# Altium PCB MSampler3.PcbDoc
Units mil, origin at the board's own origin, x right, y up, seen from the top; angles counter-clockwise.
Board outline 2555.12 x 1345 mil, 2 copper layers (Top Layer, Bottom Layer), stack 12.8 mil thick; 56 components, 51 nets, 266 pads, 108 vias.
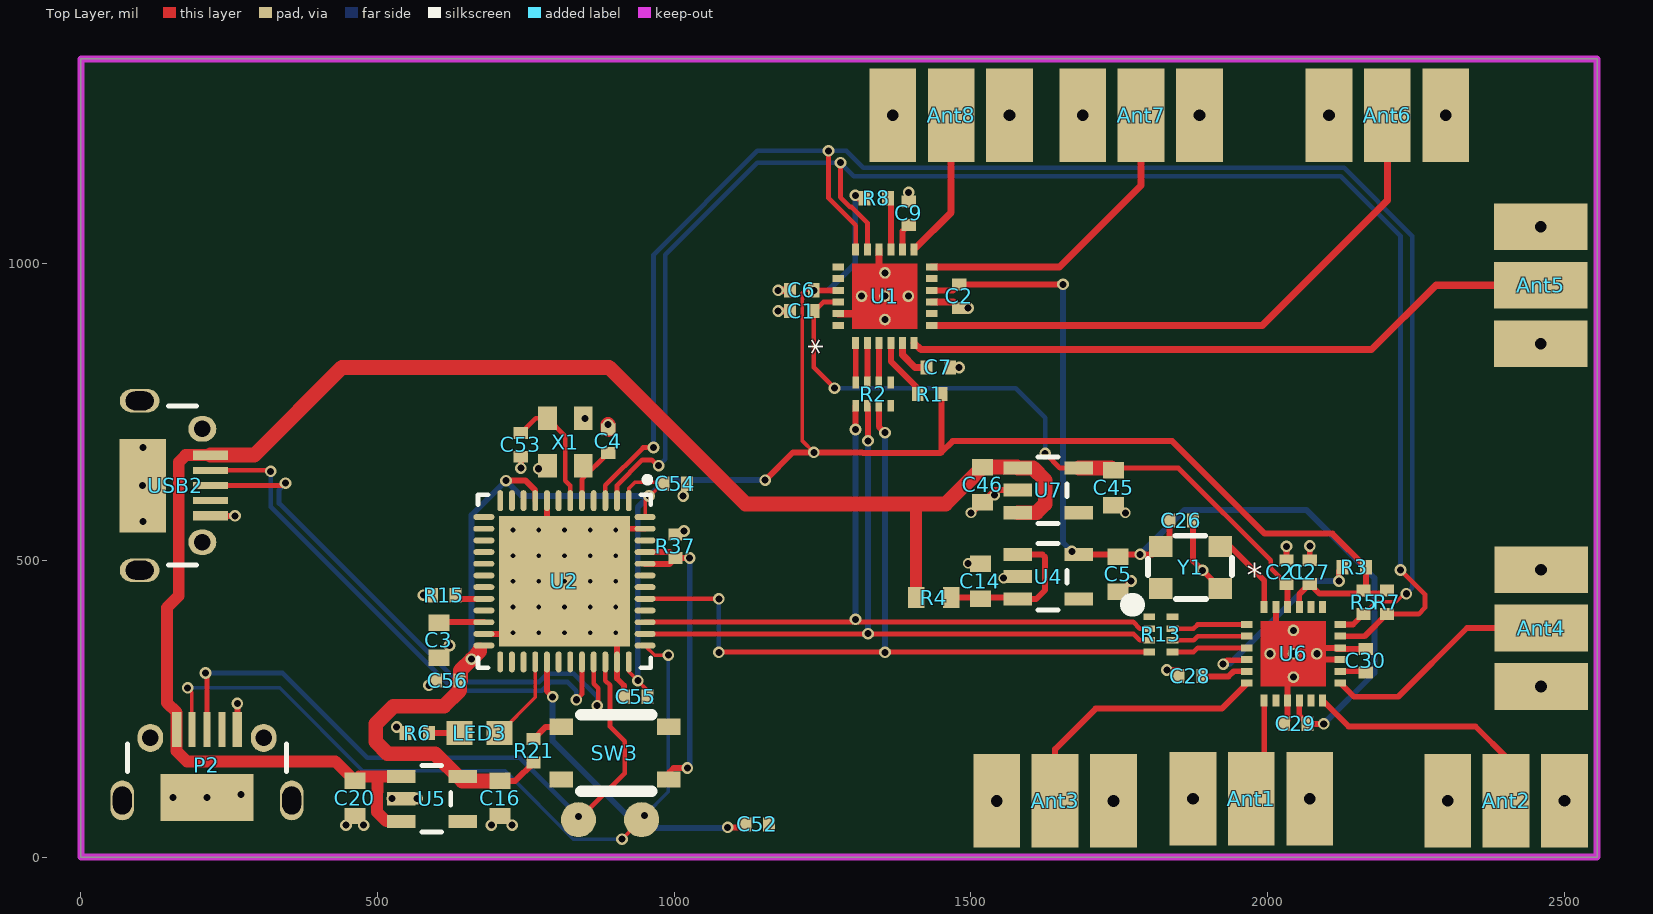
[diagram p0: Top Layer view]
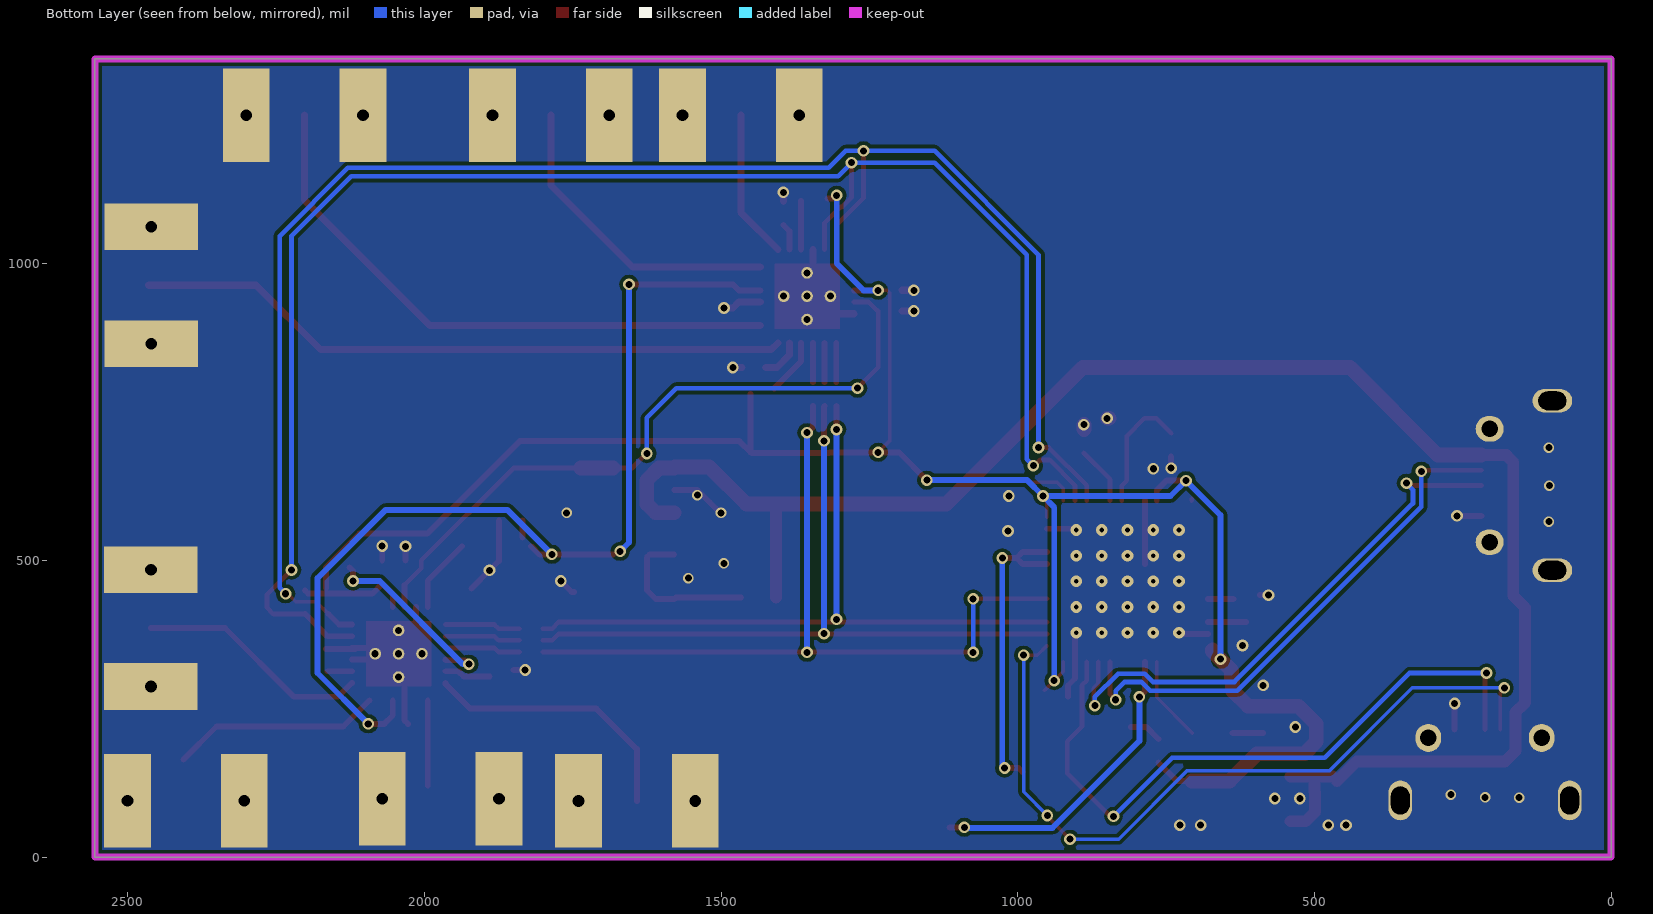
[diagram p1: Bottom Layer view, seen from below]

## Layer stack, top to bottom
Top Solder: solder mask 0.4, Solder Resist, Dk 3.5
Top Layer: signal copper 1.4
Dielectric 1: core 10, FR-4, Dk 4.2
Bottom Layer: signal copper 1.4
Bottom Solder: solder mask 0.4, Solder Resist, Dk 3.5

## Board outline
0,0 0,1345 2555.12,1345 2555.12,0

## Design rules (kind name [scope] priority, off if disabled: settings)
Clearance Clearance_1 [(InNamedPolygon('Bottom Layer-No Net')) vs Not InNet('GND')] p1: gap=15 ignorepadtopadclearanceinfootprint=FALSE except(0: Arc-Hole Track-Hole SMDPad-Hole THPad-Hole Via-Hole Fill-Hole Poly-Hole Region-Hole Text-Hole)
Clearance [All] p2: gap=6 ignorepadtopadclearanceinfootprint=FALSE except(0: Arc-Hole Track-Hole SMDPad-Hole THPad-Hole Via-Hole Fill-Hole Poly-Hole Region-Hole Text-Hole)
DiffPairsRouting [All] p1: maxlimit=10 minlimit=10 mostfreqgap=10 toplayer_minwidth=5.98 toplayer_maxwidth=15 toplayer_prefwidth=15 bottomlayer_minwidth=5.98 bottomlayer_maxwidth=15 bottomlayer_prefwidth=15 maxuncoupledlength=500
HoleSize [All] p1: absolutevalues=TRUE maxlimit=120 minlimit=1 maxpercent=80.000 minpercent=20.000
MinimumSolderMaskSliver [All] p1 off: minsoldermaskwidth=10
PlaneClearance [All] p1: clearance=10
PlaneConnect [All] p1: planeconnectstyle=Direct reliefexpansion=20 reliefentries=4 reliefconductorwidth=10 reliefairgap=10
PolygonConnect [All] p1: connectstyle=Direct reliefconductorwidth=10 reliefentries=4 polygonreliefangle="90 Angle" airgapwidth=10
RoomDefinition audio2 [InComponentClass('audio2')] p1 off: confinementstyle=ConfineIn formatcopy=TRUE lockcomponents=FALSE outline 2602.84,57.06 5672.84,57.06 5672.84,457.06 2602.84,457.06
RoomDefinition audio [InComponentClass('audio')] p2 off: confinementstyle=ConfineIn formatcopy=TRUE lockcomponents=FALSE outline -2549.45,202.29 -2037.64,202.29 -2037.64,586.14 -2549.45,586.14
RoomDefinition power [InComponentClass('power')] p3 off: confinementstyle=ConfineIn formatcopy=TRUE lockcomponents=FALSE outline -2549.45,920.79 -1456.93,920.79 -1456.93,1206.22 -2549.45,1206.22
RoomDefinition MCU [InComponentClass('MCU')] p4 off: confinementstyle=ConfineIn formatcopy=TRUE lockcomponents=FALSE outline -2057.16,232.06 287.84,232.06 287.84,472.06 -2057.16,472.06
RoutingVias [All] p1: holewidth=12 width=20 viastyle="Through Hole" minholewidth=11.81 minwidth=19.68 maxholewidth=28 maxwidth=50
SilkToBoardRegionClearance [All] p1 off:
SilkToSilkClearance [All] p1 off: silktosilkclearance=10
SilkToSolderMaskClearance [IsPad] p1 off: minsilkscreentomaskgap=10 clearancetoexposedcopper=TRUE
SolderMaskExpansion [All] p1: expansion=4
Width [All] p1: maxlimit=60 minlimit=6 preferedwidth=6
22 further rules are at their usual default settings.

## Classes and differential pairs
component class audio2: Ant5 Ant6 Ant7 Ant8 C1 C2 C6 C7 C9 R1 R2 R8 U1
component class audio: Ant1 Ant2 Ant3 Ant4 C21 C26 C27 C28 C29 C30 R3 R5 R7 R13 R26 U6 Y1
component class MCU: C3 C4 C52 C53 C54 C55 C56 LED3 P2 R6 R15 R21 R37 SW3 U2 USB2 X1
component class power: C5 C14 C16 C20 C45 C46 R4 U4 U5 U7

## Components (designator, comment, footprint, x,y, rotation, side; value= is the part's Value field where it differs from the comment)
Ant1 "Antenna" SMA 2070.87,98.43 r180 top
Ant2 "Antenna" SMA 2500,95 r180 top
Ant3 "Antenna" SMA 1740.16,94.49 r180 top
Ant4 "Antenna" SMA 2460.63,484.25 r270 top
Ant5 "Antenna" SMA 2460,865 r90 top
Ant6 "Antenna" SMA 2300,1250 r180 top
Ant7 "Antenna" SMA 1885,1250 r180 top
Ant8 "Antenna" SMA 1565,1250 r180 top
C1 "1uF" 0402 1215,920 r0 top
C2 "1uF" 0402 1480,945 r90 top
C3 "Cap" 0603L 603.46,365.25 r90 top value=4.7uF
C4 "Cap" 0402 888.54,700.79 r270 top value=20pF
C5 "4.7uF" 0603L 1748.03,476.38 r90 top
C6 "1uF" 0402 1215,955 r0 top
C7 "1uF" 0402 1445,825 r0 top
C9 "1uF" 0402 1395,1085 r270 top
C14 "4.7uF" 0603L 1515.75,464.57 r270 top
C16 "4.7uF" 0603L 706.72,98.71 r90 top
C20 "4.7uF" 0603L 461.72,98.71 r90 top
C21 "1uF" 0402 2031.5,480.32 r270 top
C26 "1uF" 0402 1854.33,566.93 r180 top
C27 "1uF" 0402 2070.87,480.32 r270 top
C28 "1uF" 0402 1870,305 r180 top
C29 "1uF" 0402 2047.24,224.41 r0 top
C30 "1uF" 0402 2165.35,330.71 r270 top
C45 "4.7uF" 0603L 1740.16,622.05 r90 top
C46 "4.7uF" 0603L 1519.43,627.48 r90 top
C52 "1nF" 0402 1140,55 r180 top
C53 "Cap" 0402 741.46,694.25 r90 top value=20pF
C54 "Cap" 0402 1001.86,629.11 r180 top value=0.1uF
C55 "Cap" 0402 935,270 r0 top value=0.1uF
C56 "Cap" 0402 618.11,297.24 r0 top value=0.1uF
LED3 "LED0" 0603 672.26,208.97 r180 top
P2 "SWD_MicroUSB" MICRO-YZX 212.6,-15.75 r0 top
R1 "Res2" 0402 1430,780 r0 top value=10k
R2 "Res*4" 0402X4 1335,780 r270 top value=200Ohm
R3 "Res2" 0402 2145.67,488.19 r0 top value=10k
R4 "FB" 0603L 1437.01,437.01 r180 top value=0Ohm
R5 "Res2" 0402 2161.42,429.13 r90 top value=10k
R6 "10k" 0402 567.26,208.97 r180 top value=0Ohm
R7 "Res2" 0402 2200.79,429.13 r90 top value=10k
R8 "Res2" 0402 1340,1110 r0 top value=10k
R13 "Res*4" 0402X4 1820,375 r0 top value=200Ohm
R15 "10k" 0402 611.46,441.25 r180 top value=0Ohm
R21 "1k" 0402 762.92,179.11 r270 top value=0Ohm
R37 "Res2" 0402 1001.97,523.62 r90 top value=10k
SW3 "SW-PB" SW3x4 900,175 r180 top
U1 "TLV320ADC3101" TLV320ADC3101 1355,945 r90 top
U2 "STM32F401CCU6" STM-UFQFPN48_N 814.96,464.57 r270 top
U4 "LP5907" SOT23-5 1629.92,472.44 r270 top
U5 "LP5907" SOT23-5 591.28,98.2 r270 top
U6 "TLV320ADC3101" TLV320ADC3101 2043.31,342.52 r0 top
U7 "LP5907" SOT23-5 1629.92,618.11 r270 top
USB2 "USB Micro Type B" MICRO-YZX -11.81,625.98 r270 top
X1 "24.000 KHz 3.2x2.5mm 8-10pf" OSCILLATOR-2.5x2.0 816.46,699.25 r90 top
Y1 "OSC_40M" TXC_7Q 1870.08,488.19 r0 top

## Footprints (in the part's own frame and the unit in brackets; to place one, negate y for a bottom-side part, rotate by r counter-clockwise, add the part's x,y. Pads: shape width x height; smd on the part's side, far side on the other; paste and mask are expansions set on the pad)
0402 [mil] "0402-RES"
  rect 20x24 smd: 1(-19.69,0) 2(20,0)
0402X4 [mm]
  rect 0.5x0.28 smd: 1(-0.5,0.75) 2(-0.5,0.25) 3(-0.5,-0.25) 4(-0.5,-0.75) 5(0.5,-0.75) 6(0.5,-0.25) 7(0.5,0.25) 8(0.5,0.75)
0603 [mil] "0603-RES"
  rect 44x40 smd: 1(-33.46,0) 2(34,0)
  body extent -31,-16 31,16, height 31
0603L [mm]
  rect 0.7x0.9 smd: 1(-0.75,0) 2(0.75,0)
  body extent -0.8,-0.4 0.8,0.4, height 0.8
MICRO-YZX [mm]
  rect 0.4x1.5 smd: 1(-1.3,5.85) 5(1.3,5.85)
  rect 0.3x1.5 smd: 2(-0.65,5.85) 3(0,5.85) 4(0.65,5.85)
  oval 1x1.7 hole 0.8 slot 1.2 at 90 deg: 5(-3.625,2.82) 5(3.625,2.82)
  oval 1.1x1.2 hole 0.7: 5(-2.425,5.5) 5(2.425,5.5)
  rect 4x2 smd: 5(0,2.95)
  silkscreen extent -3.4,4.05 3.4,5.25, body extent -4.02,0.33 3.98,5.93, height 2.6
OSCILLATOR-2.5x2.0 [mil] "OSCILLATOR-3.2X2.5"
  rect 39.37x31.5 smd: 1(-40,-30) 2(40,-30) 3(40,30) 4(-40,30)
  body extent -50,-40 50,40, height 35
SMA [mm]
  rect 2x4 smd: 1(2.5,0)
  rect 2x4 hole 0.5: GND(0,0) GND(5,0)
SOT23-5 [mil] "SOT23-5"
  rect 22x48 smd: 1(-37.4,-51.19) 2(0,-51.19) 3(38,-51.19) 4(38,52) 5(-37.4,52)
  silkscreen extent -56,-17 56,32, body extent -57,-55 57,55, height 47
STM-UFQFPN48_N [mm] "QFN, 48-Leads, Body 7.1x7.1mm, Pitch 0.5mm, Thermal Pad 5.6x5.6mm, IPC Medium Density"
  oval 0.9x0.25 smd: 1(-3.45,2.75) 2(-3.45,2.25) 3(-3.45,1.75) 4(-3.45,1.25) 5(-3.45,0.75) 6(-3.45,0.25) 7(-3.45,-0.25) 8(-3.45,-0.75) 9(-3.45,-1.25) 10(-3.45,-1.75) 11(-3.45,-2.25) 12(-3.45,-2.75) 25(3.45,-2.75) 26(3.45,-2.25) 27(3.45,-1.75) 28(3.45,-1.25) 29(3.45,-0.75) 30(3.45,-0.25) 31(3.45,0.25) 32(3.45,0.75) 33(3.45,1.25) 34(3.45,1.75) 35(3.45,2.25) 36(3.45,2.75)
  oval 0.25x0.9 smd: 13(-2.75,-3.45) 14(-2.25,-3.45) 15(-1.75,-3.45) 16(-1.25,-3.45) 17(-0.75,-3.45) 18(-0.25,-3.45) 19(0.25,-3.45) 20(0.75,-3.45) 21(1.25,-3.45) 22(1.75,-3.45) 23(2.25,-3.45) 24(2.75,-3.45) 37(2.75,3.45) 38(2.25,3.45) 39(1.75,3.45) 40(1.25,3.45) 41(0.75,3.45) 42(0.25,3.45) 43(-0.25,3.45) 44(-0.75,3.45) 45(-1.25,3.45) 46(-1.75,3.45) 47(-2.25,3.45) 48(-2.75,3.45)
  rect 5.6x5.6 smd: 49(0,0)
  silkscreen extent -4.47,-3.7 3.7,3.7, body extent -3.55,-3.55 3.55,3.55, height 0.6
SW3x4 [mm]
  rect 1x0.7 smd: 1(-2.3,1.125) 2(2.3,-1.125) 3(2.3,1.125) 4(-2.3,-1.125)
  silkscreen extent -1.58,-1.65 1.45,1.63, body extent -2,-1.5 2,1.5, height 2.6
TLV320ADC3101 [mm]
  round 0.5 hole 0.3: 0(-1,0) 0(0,1) 0(0,0) 0(0,-1) 0(1,0)
  rect 0.5x0.3 smd: 1(-2,1.25) 2(-2,0.75) 3(-2,0.25) 4(-2,-0.25) 5(-2,-0.75) 6(-2,-1.25) 13(2,-1.25) 14(2,-0.75) 15(2,-0.25) 16(2,0.25) 17(2,0.75) 18(2,1.25)
  rect 0.3x0.5 smd: 7(-1.25,-2) 8(-0.75,-2) 9(-0.25,-2) 10(0.25,-2) 11(0.75,-2) 12(1.25,-2) 19(1.25,2) 20(0.75,2) 21(0.25,2) 22(-0.25,2) 23(-0.75,2) 24(-1.25,2)
  Top Layer region: -1.4,-1.4 1.4,-1.4 1.4,1.4 -1.4,1.4
  body extent -2,-2 2,2, height 0.8
TXC_7Q [mm]
  rect 1x0.9 smd: 1(-1.275,-0.9) 2(1.275,-0.9) 3(1.275,0.9) 4(-1.275,0.9)
  silkscreen extent -2.52,-1.6 1.78,1.35

## Part data
C1 C2 C5 C6 C7 C9 C14 C16 C20 C21 C26 C27 C28 C29 C30 C45 C46 C52: library part Cap, "Capacitor"
  C5 C14 C16 C20 C45 C46: LatestRevisionDate=17-Jul-2002, LatestRevisionNote="Re-released for DXP Platform.", PackageDescription="Radial Cap, Thru-Hole; 2 Leads; 0.3 in Pin Spacing", PackageReference=RAD-0.3, Published=8-Jun-2000, Publisher="Altium Limited"
C3 C4 C53 C54 C55 C56: "Capacitor", LatestRevisionDate=17-Jul-2002, LatestRevisionNote="Re-released for DXP Platform.", PackageDescription="Radial Cap, Thru-Hole; 2 Leads; 0.3 in Pin Spacing", PackageReference=RAD-0.3, Published=8-Jun-2000, Publisher="Altium Limited"
LED3: "Typical INFRARED GaAs LED", LatestRevisionDate=08-Jul-2005, LatestRevisionNote="Mech Layer 1 removed.", PackageDescription="LED; 2 Leads", PackageReference=LED-0, Published=8-Jun-2000, Publisher="Altium Limited"
P2: "Connector SMD USB Micro Type B middle mount", Manufacturer 1="Molex Inc", Package / Case=SMD, Supplier Part Number 1=WM17142CT-ND, SCDType=undef, Supplier 1=Digi-Key
R1 R2 R3 R5 R7 R8 R13 R37: "Resistor", LatestRevisionDate=17-Jul-2002, LatestRevisionNote="Re-released for DXP Platform.", PackageDescription="Axial Device, Thru-Hole; 2 Leads; 0.4 in Pin Spacing", PackageReference=AXIAL-0.4, Published=8-Jun-2000, Publisher="Altium Limited"
R4 R6 R15 R21: library part Res2, "Resistor", LatestRevisionDate=17-Jul-2002, LatestRevisionNote="Re-released for DXP Platform.", PackageDescription="Axial Device, Thru-Hole; 2 Leads; 0.4 in Pin Spacing", PackageReference=AXIAL-0.4, Published=8-Jun-2000, Publisher="Altium Limited"
SW3: "Switch", LatestRevisionDate=17-Jul-2002, LatestRevisionNote="Re-released for DXP Platform.", PackageDescription="Switch; 2 Leads", PackageReference=SPST-2, Published=24-Mar-1999, Publisher="Altium Limited"
U2: "ARM Cortex-M4 32-bit MCU+FPU, 105 DMIPS, 256 kB Flash, 64 kB Internal RAM, 36 I/Os, 48-pin UFQFPN, -40 to 85 degC, Tray", I/Os (High Current)=36, Manufacturer=STMicroelectronics, Operating Frequency(F) (Processor speed) (MHz)=84, Supplier Part Number 1=19X6217, Supply Voltage(Vcc) max (V)=3.6, Supply Voltage(Vcc) min (V)=1.8, ComponentLink1Description="Manufacturer URL", ComponentLink1URL=http://www.st.com/web/en/home.html, ComponentLink2Description=Datasheet, ComponentLink2URL=http://www.st.com/st-web-ui/static/active/en/resource/technical/document/data_brief/DM00071938.pdf, ComponentLink3Description="Package Specification", ComponentLink3URL=http://www.st.com/st-web-ui/static/active/en/resource/technical/document/data_brief/DM00071938.pdf, Core="ARM Cortex-M4", DatasheetVersion="Rev. 1", FLASH Size (Prog) (kB)=256, Internal RAM Size (kB)=64, Mounting Technology="Surface Mount", PackageDescription="48-Pin Ultra Thin Fine Pitch Quad Flat No-Lead, 7 x 7 x 0.6 mm Body, 0.5 mm Pitch, Exposed Pad", PackageReference=UFQFPN48, PackageVersion="Rev. 1, 04/2013", Packing=Tray, PartNumber=STM32F401CCU6, Supplier 1=Newark, Supplier 2=Mouser, Supplier Part Number 2=511-STM32F401CCU6
USB2: library part USB_Micro_TypeB, "Connector SMD USB Micro Type B middle mount", Manufacturer 1="Molex Inc", Manufacturer Part Number 1=47491-0001, Package / Case=SMD, Supplier Part Number 1=WM17142CT-ND, SCDType=undef, Supplier 1=Digi-Key
X1: library part OSCILLATOR-3.2X2.5, "Crystal Oscillator in 3.2x2.5 SMD"

## Free pads (board coordinates)
  round 59.06 smd: 0(944.88,62.99) 8(838.58,62.99)

## Via types
v1: diameter 19.68, hole 11.81, Top Layer to Bottom Layer, 72 vias
v2: diameter 19.68, hole 7.87, Top Layer to Bottom Layer, 25 vias
v3: diameter 17.72, hole 11.81, Top Layer to Bottom Layer, 11 vias

## Nets (pads, with @x,y where several pads share a name; then routed paths per layer and width w, separated by ;. In a path a pad name is that pad's centre, name@x,y a point inside that pad or via, vN(x,y) a via of type N, cw(c..) or ccw(c..) an arc to the next point about the centre after c; other vN are vias at no path point)
1.8D: C1.2 C21.2 C45.2 U1.22 U6.22 U7.5 | length 1170.1
  Top Layer w8: v1(1270,790) 1235,825 C1.2 1236.14,920 1251.3,935.16 U1.22 ; v1(1625,680) 1649.49,655.51 U7.5 ; C45.2@1736.22,655.51 1849.49,655.51 2005,500 2005,486.81 C21.2
  Top Layer w10: U6.22 C21.2@2033.46,458.35
  Top Layer w25: U7.5 C45.2@1736.22,655.51
  Bottom Layer w8: v1(1270,790) 1575,790 1625,740 v1(1625,680)
3.3A: C2.2 C5.2 C26.2 C29.2 U1.10 U4.5 U6.10 Y1.4 | length 1681.3
  Top Layer w10: U1.10 1469.84,954.84 C2.2 v1(1655,965) ; U4.5 1806.1,509.84 Y1.4 ; Y1.4@1834.33,538.07 C26.2 ; U6.10 2053.15,238.5 C29.2 v1(2094.41,224.41)
  Bottom Layer w10: v1(1655,965) 1655,530 v1(1670,515) ; v1(1785,510) 1860,585 2065,585 2180,470 2180,310 v1(2094.41,224.41)
3.3D: C6.2 C16.2 C27.2 C54.2 C55.2 C56.2 R1.2 R3.2 R5.2 R7.2 R8.1 R21.2 U1.21 U2.1 U2.9 U2.24 U2.36 U2.48 U5.5 U6.21 | length 4040.8
  Top Layer w6: U2.36 923.23,312.48 v1(938.46,297.24) C55.2@955,280.71 ; U2.1 923.23,621.02 933.78,631.57 982.28,631.57 950.79,600.08 U2.48 ; 1216.31,940 1216,939.68 ; C6.2 1220,955 1216,951 1216,939.68 ; v1@1235.16,681.79 1216,700.95 1216,939.68
  Top Layer w10: U5.5 C16.2@699.35,135.6 ; C16.2 732.05,128.24 R21.2 ; v1(716.46,634.25) 749.46,634.25 765.75,617.96 U2.9 ; v1(1153.21,635) 1200,681.79 1235.16,681.79 1316.36,681.79 1317.68,680.47 1448.68,680.47 1450,681.79 ; v1(1235.16,954.84) U1.21 ; v1(1305,1115) 1310,1110 R8.1 ; R1.2 1450,681.79 ; U6.21 2053.15,442.6 C27.2 2087.02,444.16 2195.81,444.16 R7.2 ; R5.2@2165.67,453.39 R3.2 2108.86,545 1995,545 1839.16,700.84 1469.05,700.84 1450,681.79
  Top Layer w25: 671.86,349.11 671.86,346.65 v1(658.46,333.25) 639.67,314.47 639.67,297.24 C56.2 638.11,280.36 611.86,254.11 526.86,254.11 496.86,224.11 496.86,194.11 516.86,174.11 596.86,174.11 642.73,128.24 C16.2
  Bottom Layer w10: v1(658.46,333.25) 658.46,576.25 v1(716.46,634.25) 742.46,608.25 v1(957.46,608.25) ; v1(938.46,297.24) 938.46,589.26 v1(957.46,608.25) ; v1(1153.21,635) 984.2,635 v1(957.46,608.25) ; v1(1235.16,954.84) 1259.84,954.84 1305,1000 v1(1305,1115)
  other v1: 1235.16,681.95
5V: C20.2 C46.2 P2.1 R4.2 U5.1 U5.3 U7.1 U7.3 USB2.1 | length 2906.4
  Top Layer w20: USB2.1 176.66,677.17 165,665.5 165,440 145,420 145,260 161.42,243.58 P2.1 161.42,178.58 178.83,161.17 428.79,161.17 C20.2 ; C20.2@469.08,135.6 500,135.6 ; U5.3 514.8,60.2 498.87,76.13 498.87,109.41 500,110.54 500,135.6 ; U5.1 500,135.6 ; R4.2 1407.48,595
  Top Layer w25: USB2.1 292.17,677.17 440,825 890,825 1120,595 1457.42,595 C46.2 U7.1@1577.24,657.01 ; U7.3 1610.11,580.11 1625,595 1625,635 1604.49,655.51 U7.1
GND: Ant1.GND Ant2.GND Ant3.GND Ant4.GND Ant5.GND Ant6.GND Ant7.GND Ant8.GND C1.1 C2.1 C3.1 C4.1 C5.1 C6.1 C7.2 C9.1 C14.1 C16.1 C20.1 C21.1 C26.1 C27.1 C28.2 C29.1 C30.1 C45.1 C46.1 C53.1 C54.1 C55.1 C56.1 P2.5 R6.2 R15.2 R37.2 U1.0 U1.9 U1.16 U1.23 U2.8 U2.23 U2.35 U2.47 U2.49 U4.2 U5.2 U6.0 U6.9 U6.15 U6.16 U6.23 U7.2 USB2.5 X1.2 X1.4 Y1.2 | length 1278.1
  Top Layer w10: USB2.5@218.5,574.8 v1(259.8,574.8) ; P2.5@263.78,214.57 v1(263.78,258.78) ; v1(577.46,441.25) R15.2 ; U2.23 U2.49@726.38,375.98 ; v1(741.46,655.25) C53.1 ; U2.49@785.43,494.09 U2.8 ; U2.49@903.54,375.98 U2.35 903.54,300.8 915.32,289.02 C55.1 ; U2.49@903.54,553.15 U2.47 ; v3(1500,580) 1501.48,580 C46.1 1539.59,618.11 U7.2 ; C5.1 1751.85,446.85 v1(1770,465) ; v1(1830,315) C28.2@1850,315 ; C26.1 1874.02,499.02 v1(1890,483.03) Y1.2 ; 2013.78,361.22 U6.23 ; C29.1 2033.46,230.31 U6.9 2033.46,293.31 ; C21.1 v1(2031.5,523.5) ; 2062.68,332.68 U6.15 ; 2067.64,352.36 U6.16 ; C27.1 v1(2070.87,524.13) ; U6.16@2116.97,350.39 C30.1
  Top Layer w12: v1(1175,920) C1.1 ; v1(1175,955) C6.1 ; U1.23 1309.53,915.47 ; 1345.16,975.16 U1.16 ; C9.1 v1(1395,1120) ; U1.9 1470.16,935.16 C2.1 1480.31,925 v1(1495,925) ; C7.2 v1(1480,825)
  Top Layer w25: X1.2 v1(849.25,739.25) ; C4.1 v1(888.54,728.54)
  other v1: 446.72,53.71 476.72,53.71 691.72,53.71 726.72,53.71 524.72,98.71 566.72,98.71 532.26,218.97 586.46,289.25 621.19,356.28 1016.46,549.25 1014.89,608.24 771.46,654.25
  other v2: 728.35,377.95 771.65,377.95 814.96,377.95 858.27,377.95 901.57,377.95 728.35,421.26 771.65,421.26 814.96,421.26 858.27,421.26 901.57,421.26 728.35,464.57 771.65,464.57 814.96,464.57 858.27,464.57 901.57,464.57 728.35,507.87 771.65,507.87 814.96,507.87 858.27,507.87 901.57,507.87 728.35,551.18 771.65,551.18 814.96,551.18 858.27,551.18 901.57,551.18
  other v3: 155,100 212.6,100.39 270,105 1555,470 1495,495 105,565 1760,580 1540,610 104.33,625.98 105,690
KEY: R37.1 SW3.1 U2.44 U2.45 | length 523.1
  Top Layer w10: U2.44 992.13,494.09 R37.1 ; U2.45 992.13,513.78 R37.1 ; SW3.1@992.01,143.19 998.82,150 v1(1022.13,150) ; v1(1026.06,503.94) R37.1
  Bottom Layer w10: v1(1022.13,150) 1026.06,153.94 v1(1026.06,503.94)
NetAnt1_1: Ant1.1 U6.7 | length 143.7
  Top Layer w10: Ant1.1@1994.09,120.08 U6.7
NetAnt2_1: Ant2.1 U6.12 | length 354.1
  Top Layer w10: U6.12 2136.3,220 2310,220 2350,220 Ant2.1@2405.51,164.49
NetAnt3_1: Ant3.1 U6.6 | length 457.1
  Top Layer w10: Ant3.1 1641.73,181.73 1710,250 1922.61,250 1964.57,291.96 U6.6
NetAnt4_1: Ant4.1 U6.13 | length 396.2
  Top Layer w10: U6.13 2145.35,270 2220,270 2335.83,385.83 2394.17,385.83 Ant4.1
NetAnt5_1: Ant5.1 U1.6 | length 1110.4
  Top Layer w12: U1.6 1415.47,855 2175,855 2283.43,963.43 Ant5.1@2465,963.43
NetAnt6_1: Ant6.1 U1.7 | length 998.6
  Top Layer w12: U1.7 1990.79,895.79 2201.57,1106.57 Ant6.1
NetAnt7_1: Ant7.1 U1.12 | length 528.2
  Top Layer w12: U1.12 1649.21,994.21 1786.57,1131.57 Ant7.1
NetAnt8_1: Ant8.1 U1.13 | length 252.1
  Top Layer w12: U1.13 1466.57,1086.1 Ant8.1
NetC3_2: C3.2 U2.22 | length 63.7
  Top Layer w10: C3.2@615.46,395.67 U2.22
NetC4_2: C4.2 U2.5 X1.1 | length 98.6
  Top Layer w8: U2.5 844.49,636.73 C4.2
NetC7_1: C7.1 U1.5 | length 69.6
  Top Layer w12: U1.5 1384.53,846.2 1405.72,825 C7.1
NetC9_2: C9.2 U1.14 | length 45.6
  Top Layer w10: U1.14 1384.53,1054.53 C9.2
NetC14_2: C14.2 R4.1 U4.1 U4.3 | length 269.2
  Top Layer w10: R4.1 1576.17,437.01 U4.3 1609.44,434.44 1625,450 1625,505 1620.16,509.84 U4.1
NetC28_1: C28.1 U6.5 | length 78.5
  Top Layer w10: C28.1@1889.69,304.16 1933.63,304.16 1942.47,312.99 U6.5
NetC30_2: C30.2 U6.14 | length 41
  Top Layer w10: U6.14 C30.2@2163.07,312.99
NetC52_1: C52.1
NetC52_2: C52.2 U2.29 | length 518.2
  Top Layer w10: U2.29 785.43,279.57 v1(795,270) ; v1(1090,50) C52.2@1115,50
  Bottom Layer w10: v1(795,270) 795,195.52 941.37,49.16 1089.16,49.16 v1(1090,50)
NetC53_2: C53.2 U2.6 X1.3 | length 210.1
  Top Layer w8: C53.2 766.46,739.25 X1.3 816.46,709.25 816.46,634.25 824.8,625.91 U2.6
NetLED3_1: LED3.1 U2.28 | length 144.6
  Top Layer w6: LED3.1 765.75,268.99 U2.28
NetLED3_2: LED3.2 R6.1 | length 51.3
  Top Layer w10: R6.1 LED3.2
NetR1_1: R1.1 U1.4 | length 95.4
  Top Layer w10: U1.4 1364.84,835.16 R1.1@1410.31,789.68
NetR2_2: R2.2 U1.3 | length 66.3
  Top Layer w10: R2.2@1345.16,800 U1.3
NetR2_3: R2.3 U1.2 | length 66.3
  Top Layer w10: R2.3@1325.47,800 U1.2
NetR2_4: R2.4 U1.1 | length 66.3
  Top Layer w10: R2.4@1305.79,800 U1.1
NetR2_5: R2.5 R13.2 U2.39 | length 1214.3
  Top Layer w8: U2.39 951.28,396.16 1773.33,396.16 1784.65,384.84 R13.2
  Top Layer w10: v1(1305.47,720.47) R2.5
  Bottom Layer w10: v1(1305.47,400.47) v1(1305.47,720.47)
NetR2_7: R2.7 R13.4 U2.41 | length 1359.2
  Top Layer w8: U2.41 v1@1074.96,435.04 ; v1(1075,345) 1075.47,345.47 R13.4
  Top Layer w10: R2.7 1344.84,725.16 v1(1355,715)
  Bottom Layer w8: v1(1075,345) v1(1075,435)
  Bottom Layer w10: v1(1355,345) v1(1355,715)
NetR3_1: R3.1 U6.4 | length 322.1
  Top Layer w10: v1(1925,325) 1931.52,331.52 1964.57,331.52 U6.4 ; v1(2120,465) 2120,482.2 R3.1
  Bottom Layer w10: v1(1925,325) 1935,325 2075,465 v1(2120,465)
NetR5_1: R5.1 U1.18 U2.3 U6.18 | length 2794.3
  Top Layer w6: R5.1 2181.97,430 2216.38,430 2230,443.62 v1(2233.62,443.62)
  Top Layer w8: U2.3 883.86,626.45 947.41,690 v1(965,690) ; v1(1260,1190) 1260,1110 1305.79,1064.21 U1.18
  Top Layer w10: U6.18 2143.7,391.73 R5.1
  Bottom Layer w8: v1(965,690) 965,1015 1140,1190 v1(1260,1190) 1290.04,1190 1318.78,1161.26 2128.74,1161.26 2243.56,1046.44 2243.56,453.56 v1(2233.62,443.62)
NetR7_1: R7.1 U1.17 U2.2 U6.17 | length 2805
  Top Layer w8: U2.2 903.54,626.34 946.32,669.11 962.17,669.11 971.86,659.43 v1(973.69,659.43) ; v1(1280,1170) 1280,1111.94 1296.78,1095.16 1299.02,1095.16 1325.47,1068.7 U1.17 ; R7.1 2254.45,409.45 2265,420 2265,442.44 v1(2223.72,483.72)
  Top Layer w10: U6.17 2163.39,372.05 R7.1
  Bottom Layer w8: v1(973.69,659.43) 984.84,670.58 984.84,1014.84 1140,1170 v1(1280,1170) 1302.74,1147.26 2122.94,1147.26 2223.72,1046.48 v1(2223.72,483.72)
NetR8_2: R8.2 U1.15 | length 81.4
  Top Layer w10: U1.15 R8.2@1364.84,1105.16
NetR13_5: R13.5 U6.3 | length 127.7
  Top Layer w8: R13.5 1875.47,345.47 1882.36,352.36 U6.3
NetR13_6: R13.6 U6.2 | length 127.7
  Top Layer w8: R13.6 1875.16,365.16 1882.05,372.05 U6.2
NetR13_7: R13.7 U6.1 | length 127.7
  Top Layer w8: R13.7 1874.84,384.84 1881.73,391.73 U6.1
NetR15_1: R15.1 U2.20 | length 42.8
  Top Layer w10: R15.1@636.35,435.04 U2.20
NetR21_1: R21.1 SW3.2 | length 55
  Top Layer w10: R21.1 783.42,219.29 SW3.2
NetU2_12: U2.12 | length 2.9
  Top Layer w8: U2.12 U2.12@706.69,603.31
NetU2_40: U2.40
NetU6_24: U6.24 Y1.3 | length 126.3
  Top Layer w10: Y1.3@1936.38,523.62 1994.09,465.91 U6.24
PA9: U2.30
PA10: U2.31
PA11: U2.32 USB2.2 | length 898.4
  Top Layer w8: USB2.2 v1@318.43,651.57 ; v1(835,265) 844.49,274.49 U2.32
  Bottom Layer w8: v1(320,650) 320,590 630,280 776.94,280 791.94,295 820,295 835,280 v1(835,265)
PA12: U2.33 USB2.3 | length 933.9
  Top Layer w8: USB2.3 v1@340.98,625.98 ; U2.33 864.17,291.8 871.86,284.11 v1@871.86,256.86
  Bottom Layer w8: v1(345,630) 334,619 334,595.8 634.8,295 772.14,295 786.14,309 831,309 870,270 v1(870,255)
PA13: P2.3 pad.8 U2.34 | length 1138.5
  Top Layer w8: P2.3 v1@212.6,307.4 ; v1(838.58,68.58) pad.8 916.46,140.87 916.46,194.86 891.86,219.46 891.86,289.11 883.86,297.11 U2.34
  Bottom Layer w8: v1(210,310) 340,310 482.83,167.17 740,167.17 v1(838.58,68.58)
PA14: P2.2 pad.0 U2.37 | length 1280.1
  Top Layer w6: P2.2 187.01,277.99 ; v1(911.89,30) pad.0 ; U2.37 967.09,340 v1(990,340)
  Bottom Layer w6: v1(180,285) 335,285 475,145 715,145 830,30 v1(911.89,30) ; v1(950,70) 990,110 v1(990,340)
PA15: R2.6 R13.3 U2.38 | length 1238.5
  Top Layer w8: U2.38 1773.71,375.98 1784.53,365.16 R13.3
  Top Layer w10: R2.6 1326.31,759.16 v1(1326.31,701.31)
  Bottom Layer w10: v1(1326.31,376.31) v1(1326.31,701.31)
pads on no net: P2.4 R2.1 R2.8 R13.1 R13.8 SW3.3 SW3.4 U1.8 U1.11 U1.19 U1.20 U1.24 U2.4 U2.7 U2.10 U2.11 U2.13 U2.14 U2.15 U2.16 U2.17 U2.18 U2.19 U2.21 U2.25 U2.26 U2.27 U2.42 U2.43 U2.46 U4.4 U5.4 U6.8 U6.11 U6.19 U6.20 U7.4 USB2.4 Y1.1

## Polygon pours and split planes (outlines as drawn)
GND on Bottom Layer "GND_L02_P020" (solid, remove dead copper, pour order 20): 0,0 2555.12,0 2555.12,1340 0,1340

## Keep-outs
Keep-Out Layer:
  the board outline again, w12

## Text inside footprints (layer, text, board x,y; h text height)
R2: Mechanical 1 "R1" at 1327.16,772.91 h11.81
R13: Mechanical 1 "R1" at 1827.09,367.16 h11.81 r90
U1: Top Overlay "*" at 1266.42,846.57 h39.37 r90
U6: Top Overlay "*" at 1965,455 h39.37